# EAGLE board LAB-ASDM300F (EAGLE 6.6.0)
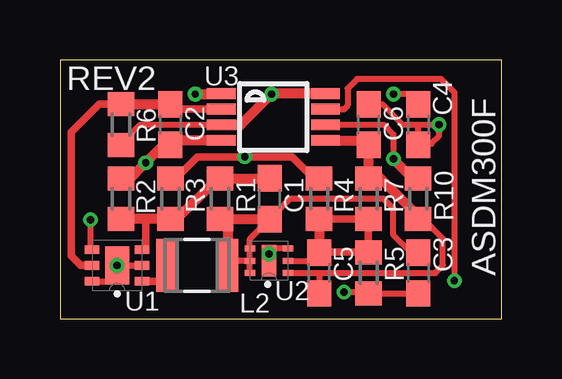
[diagram p0: board, top side]
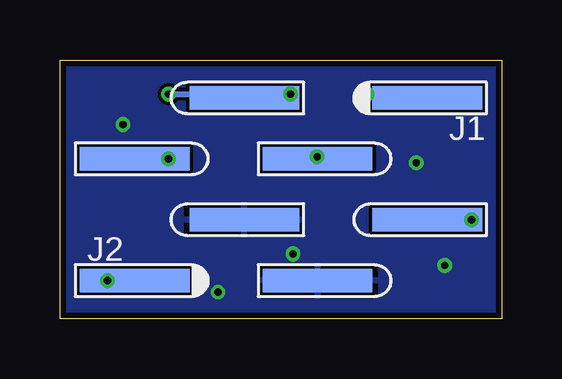
[diagram p1: board, bottom side, seen from below]

Size 18.41 x 10.79 mm. Coordinates in mm from the lower left corner, seen from the top.
Outline: 0,0 18.41,0 18.41,10.79 0,10.79 0,0
Copper layers (1*16): Top 0.035mm / dielectric 1.5mm / Bottom 0.035mm
Design rules "SeeedStudio_2layer_DRU_no_angle_20140221 *": minimum track width 6mil, minimum drill 12mil, track to track 6mil, track to pad 6mil, pad to pad 6mil, via to via 6mil, smd to smd 0mil, copper to edge 10mil, drill to drill 10mil, minimum pad ring 10mil, minimum via ring 6mil, stop-mask expansion 2mil, vias tented up to drill 100mil, thermal gap 10mil

## Footprints (pad centres in the part's own frame; a part is rotated, then mirrored left to right if it is on the bottom)
C0603 = smd 1.1 x 1: 1 -0.85,0; 2 0.85,0
SMTHEADER-4 = smd 0.991 x 4.572: P$1 0,2.286; P$2 2.54,-2.286; P$3 5.08,2.286; P$4 7.62,-2.286
INDC2520X18N = smd 0.864 x 2.21: 1 -1.27,0; 2 1.27,0
R0603 = smd 1 x 1.1: 1 -0.85,0; 2 0.85,0
SON65P210X210X80-7N = smd 0.61 x 0.356: 1 -1.041,0.66; 2 -1.041,0; 3 -1.041,-0.66; 4 1.041,-0.66; 5 1.041,0; 6 1.041,0.66 | smd 0.991 x 1.6: 7 0,0
SON65P160X160X80-7N = smd 0.45 x 0.25: 1 -0.787,0.514; 2 -0.787,0.004; 3 -0.787,-0.506; 4 0.795,-0.506; 5 0.795,0.004; 6 0.795,0.514 | smd 0.6 x 1.3: 7 0.004,0.004
UMAX8 = smd 0.45 x 1.2: 1 -0.975,-2.175; 2 -0.325,-2.175; 3 0.325,-2.175; 4 0.975,-2.175; 5 0.975,2.175; 6 0.325,2.175; 7 -0.325,2.175; 8 -0.975,2.175

## Placement (x,y rotation side)
C1  33pF  [C0603]  8.73,5 90 top
C2  4.7uF  [C0603]  4.6,8.1 270 top
C3  10uF  [C0603]  14.92,1.91 270 top
C4  .1uF  [C0603]  14.92,8.1 270 top
C5  10nF  [C0603]  10.79,1.91 90 top
C6  4.7uF  [C0603]  12.86,8.1 90 top
J1  SULLINSSMTHEADER-4  [SMTHEADER-4]  5.4,9.21 270 bottom
J2  SULLINSSMTHEADER-4  [SMTHEADER-4]  13.02,1.59 90 bottom
L2  2200 nH  [INDC2520X18N]  5.71,2.22 180 top
R1  330k  [R0603]  6.67,5 270 top
R2  82k  [R0603]  2.54,5 270 top
R3  560k  [R0603]  4.6,5 270 top
R4  220k  [R0603]  10.79,5 270 top
R5  91k  [R0603]  12.86,1.91 270 top
R6  .1R  [R0603]  2.54,8.1 90 top
R7  130k  [R0603]  12.86,5 90 top
R10  .1R  [R0603]  14.92,5 270 top
U1  TPS62240DRVTG4  [SON65P210X210X80-7N]  2.38,2.22 180 top
U2  MIC94325  [SON65P160X160X80-7N]  8.71,2.42 180 top
U3  MAX4377HAUA  [UMAX8]  8.89,8.41 270 top

## Library data of the parts
C1-C6 R1-R7 R10 = rcl
J1 J2 = LAB-ASDM300F
L2 = Bourns_By_element14_Batch_1; MPN: PM1008-2R2K-RC; OC_FARNELL: -; OC_NEWARK: 63K3050; SUPPLIER: BOURNS; TOLERANCE: ±10 %
U1 = Texas Instruments_By_element14_Batch_1; MPN: TPS62240DRVTG4; OC_FARNELL: 1511851; OC_NEWARK: 59M7215; PACKAGE: SON-6; SUPPLIER: Texas Instruments
U2 U3 = My Library-adm

## Nets
BUCKFB: C1.2 R1.1 R2.2 R3.2 U1.3
BUCKOUT: C1.1 C3.1 L2.1 R1.2 U2.4 U2.5 U2.6
EN: J1.P$3 U1.4
INCURRENT: J1.P$1 U3.1
LDOADJ: C5.2 R4.2 R5.1 R7.1 U2.2
N$1: L2.2 U1.1
N$3: C2.1 R6.2 U1.5 U3.2
N$4: C5.1 C6.1 R7.2 R10.2 U2.1 U3.5
OUTCURRENT: J2.P$1 U3.7
PE: C2.2 C3.2 C4.2 C6.2 J1.P$4 J2.P$2 R2.1 R5.2 U1.2 U1.6 U1.7 U2.3 U2.7 U3.4
VADJ: J1.P$2 R3.1 R4.1
VIN: C4.1 J2.P$4 R6.1 U3.3 U3.8
VOUT: J2.P$3 R10.1 U3.6

## Tracks (layer width: path | path; a pad name or v marks a point on that pad's centre or on a via)
BUCKFB
  Top 0.254: U1.3 3.55,2.88 3.57,2.86 | 3.57,4.07 3.49,4.15 | 4.68,4.07 4.79,4.07 | 6.49,5.77 6.57,5.85 R1.1
  Top 0.305: 3.57,2.86 3.57,4.07
  Top 0.406: R1.1 C1.2 | 4.79,4.07 6.49,5.77 | R2.2 3.49,4.15 R3.2 4.68,4.07
BUCKOUT
  Top 0.254: 6.99,2.89 6.86,3.02 6.86,2.73 6.83,2.7 7.14,2.38 L2.1 7.18,2.42 U2.5 | 7.12,4.15 6.86,3.88 6.67,4.07 R1.2 | C3.1 14.63,2.75 13.89,3.49 13.89,4.6 13.49,5 9.58,5 C1.1 7.92,3.33 U2.4 U2.5 | U2.6 U2.5
  Top 0.406: 7.12,4.15 C1.1 | 6.99,4.13 L2.1
EN  (via drill 0.3)
  Top 0.254: v1.27,4.13 1.27,2.95 U1.4
  Bottom 0.254: v1.27,4.13 J1.P$3
INCURRENT  (via drill 0.3)
  Top 0.254: 6.69,9.37 U3.1
  Top 0.406: v5.64,9.37 6.69,9.37
  Bottom 0.254: v5.64,9.37 2.95,9.37 J1.P$1
LDOADJ
  Top 0.254: 10.77,2.78 C5.2 | C5.2 10.79,2.38 | 11.09,2.46 C5.2 | 12.84,2.78 R5.1 | 12.84,4.13 R7.1 | U2.2 10.46,2.42 C5.2
  Top 0.305: 10.77,2.78 12.84,2.78 12.84,4.13 | R4.2 R7.1
  Top 0.406: R4.2 10.79,2.86
N$1
  Top 0.254: 4.42,1.56 4.45,1.59 L2.2
  Top 0.305: U1.1 4.42,1.56
N$3
  Top 0.254: 4.6,8.74 C2.1
  Top 0.305: U3.2 4.6,8.74 | U1.5 0.87,2.22 0.48,2.62 0.48,7.78 1.64,8.95 R6.2
  Top 0.406: R6.2 C2.1
N$4
  Top 0.254: 12.67,7.44 C6.1 | 12.84,5.87 R7.2 | 10.77,1.03 C5.1 | 10.81,1.07 C5.1 | 15.14,4.15 15.95,3.33 15.95,2.22 15.64,1.91 U2.1 | U2.1 | U2.1 10.79,1.91 C5.1
  Top 0.406: U3.5 12.67,7.44 | C6.1 R7.2 13.36,5.85 14.92,4.29 R10.2 15.14,4.15
OUTCURRENT  (via drill 0.3)
  Top 0.254: v16.43,1.59 16.43,9.45 15.88,10 12.38,10 11.99,9.6 11.99,8.89 11.83,8.74 U3.7
  Bottom 0.254: J2.P$1 v16.43,1.59 16.83,1.59
PE  (via drill 0.3)
  Top 0.254: 12.86,9.05 C6.2 13.44,8.95 14.29,8.1 14.92,8.1 | 8.71,2.38 U2.7 v8.71,2.69 v8.71,2.7 8.94,2.93 U2.3 | U1.2 U1.7 2.38,1.75 2.2,1.56 U1.6 | R2.1 2.62,5.77 2.83,5.77 | C3.2 R5.2 12.8,1.11 v11.83,1.11 | 14.92,7.38 14.92,7.46 | 15.16,7.54 15.16,7.48 C4.2 14.95,7.25 | 14.92,8.1 v15.8,8.1 15.8,7.62 15.48,7.3 14.92,7.3 | 15.16,7.62 15.16,7.54 | 15.16,7.54 14.92,7.3 | 14.92,7.3 14.92,8.1
  Top 0.305: 4.6,7.44 C2.2 4.31,7.25
  Top 0.406: U3.4 4.6,7.44 | 2.83,5.77 v3.57,6.51 4.31,7.25 | C4.2 14.92,7.3 14.92,7.38
  other vias: 2.38,2.22
  pour Bottom: 0,10.79 0,0 18.41,0 18.41,10.79
VADJ  (via drill 0.3)
  Top 0.254: R3.1 4.82,5.85 | R4.1 10.58,5.85
  Top 0.305: 4.82,5.85 5.71,6.75 v7.7,6.75 9.68,6.75 10.58,5.85
  Bottom 0.254: v7.7,6.75 7.7,6.68 J1.P$2
VIN  (via drill 0.3)
  Top 0.254: 2.33,7.25 R6.1 2.54,7.3 3.33,8.1 6.71,8.1 U3.3 | C4.1 14.92,9.29 15,9.37 v13.89,9.37
  Top 0.406: U3.8 8.83,9.39 v8.81,9.37 7.53,8.09 U3.3
  Bottom 0.254: v8.81,9.37 8.83,9.39 U3.8 11.48,8.97 11.88,9.37 v13.89,9.37
  Bottom 0.406: v8.81,9.37 10.57,9.37 J2.P$4
VOUT  (via drill 0.3)
  Top 0.254: U3.6 13.5,8.09 13.89,7.7 v13.89,6.67
  Top 0.406: R10.1 14.71,5.85 v13.89,6.67
  Bottom 0.254: v13.89,6.67 J2.P$3

## Text on the board
tPlace: REV2 | ASDM300F